# Altium PCB ESP Guage PCB_PCB.PcbDoc
Units mm, origin at the board's own origin, x right, y up, seen from the top; angles counter-clockwise.
Board outline 45 x 40 mm, 2 copper layers (Top Layer, Bottom Layer); 64 components, 47 nets, 224 pads, 44 vias.
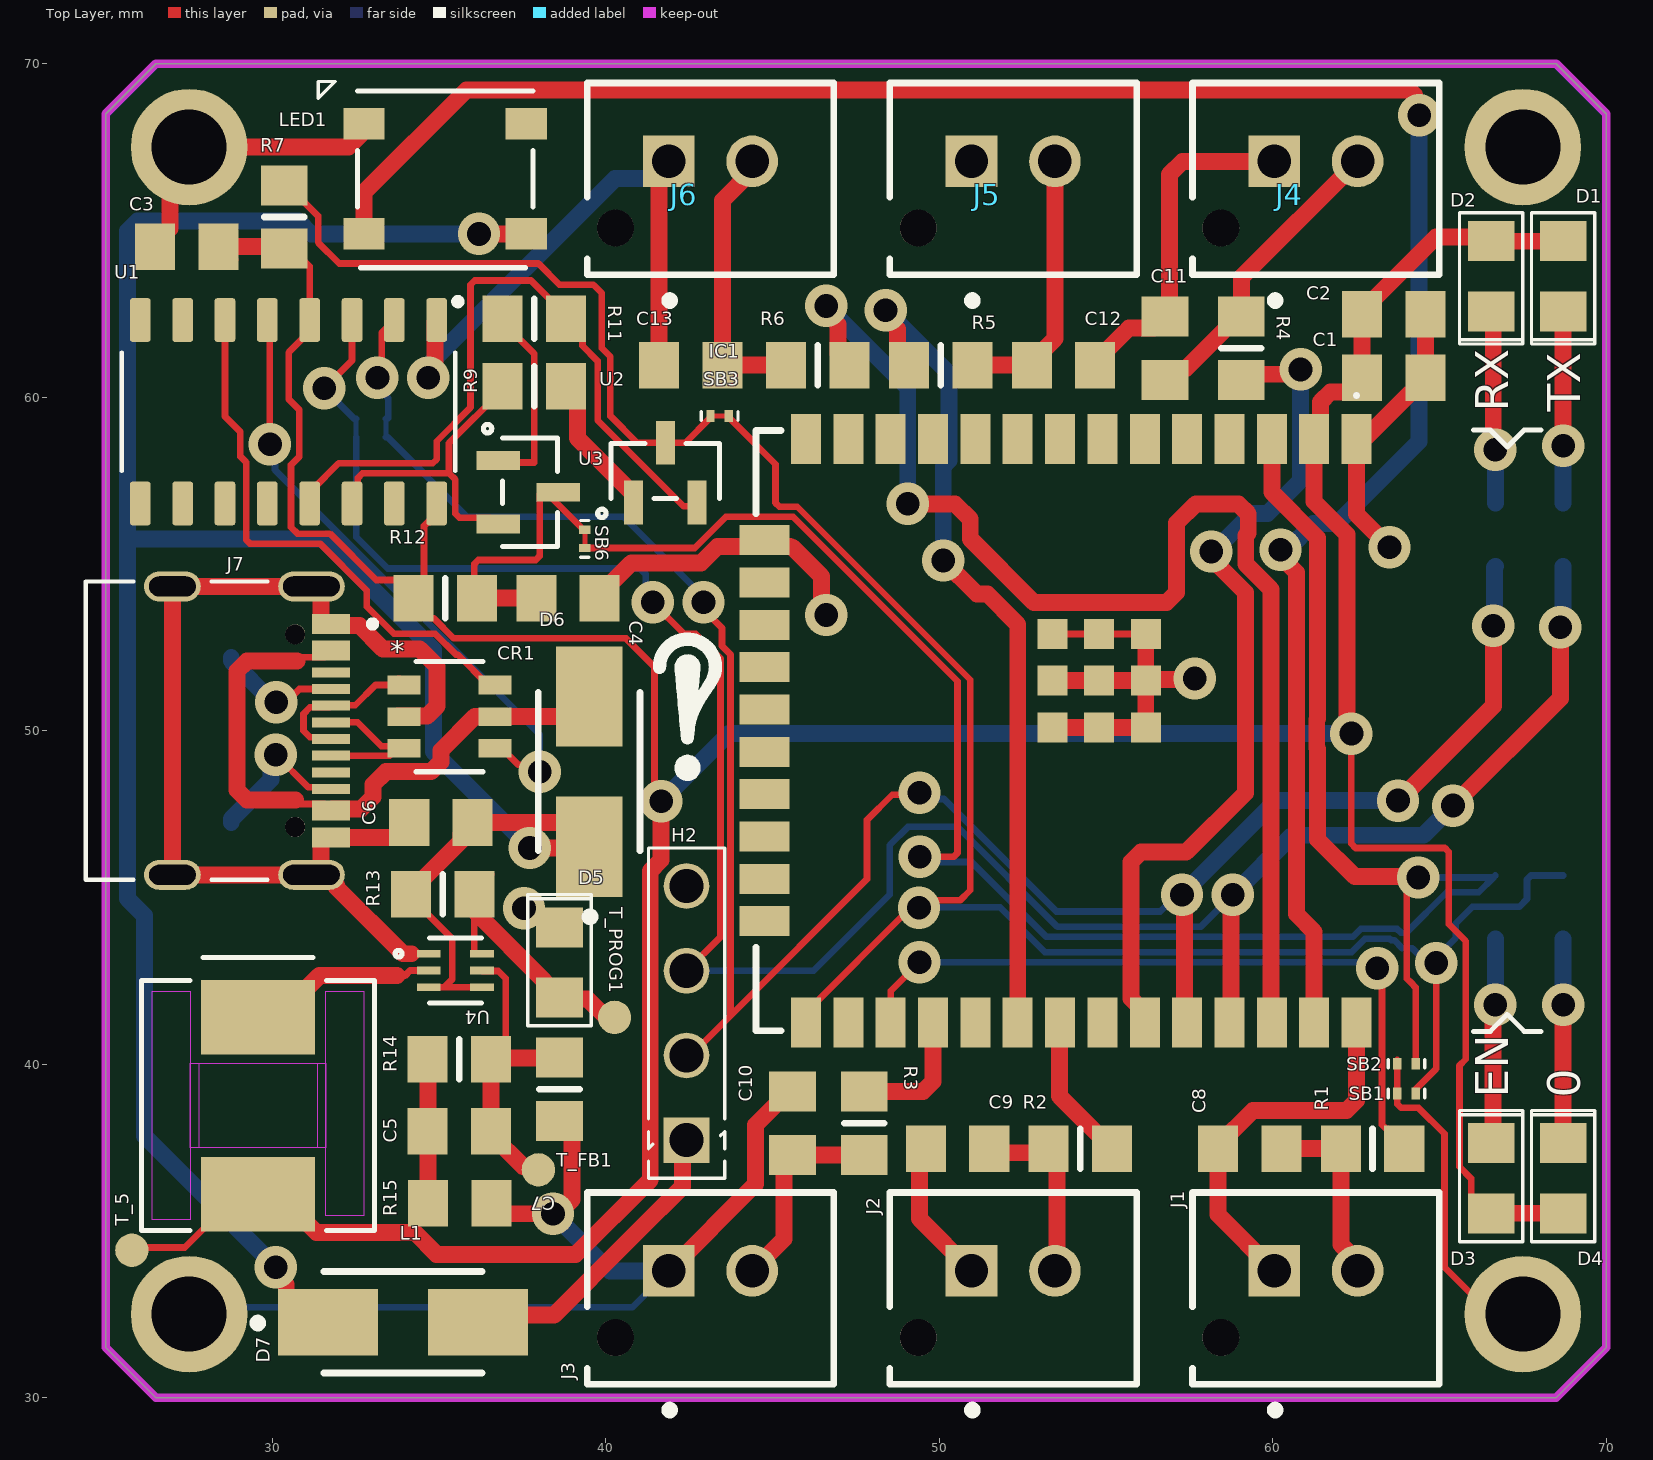
[diagram p0: Top Layer view]
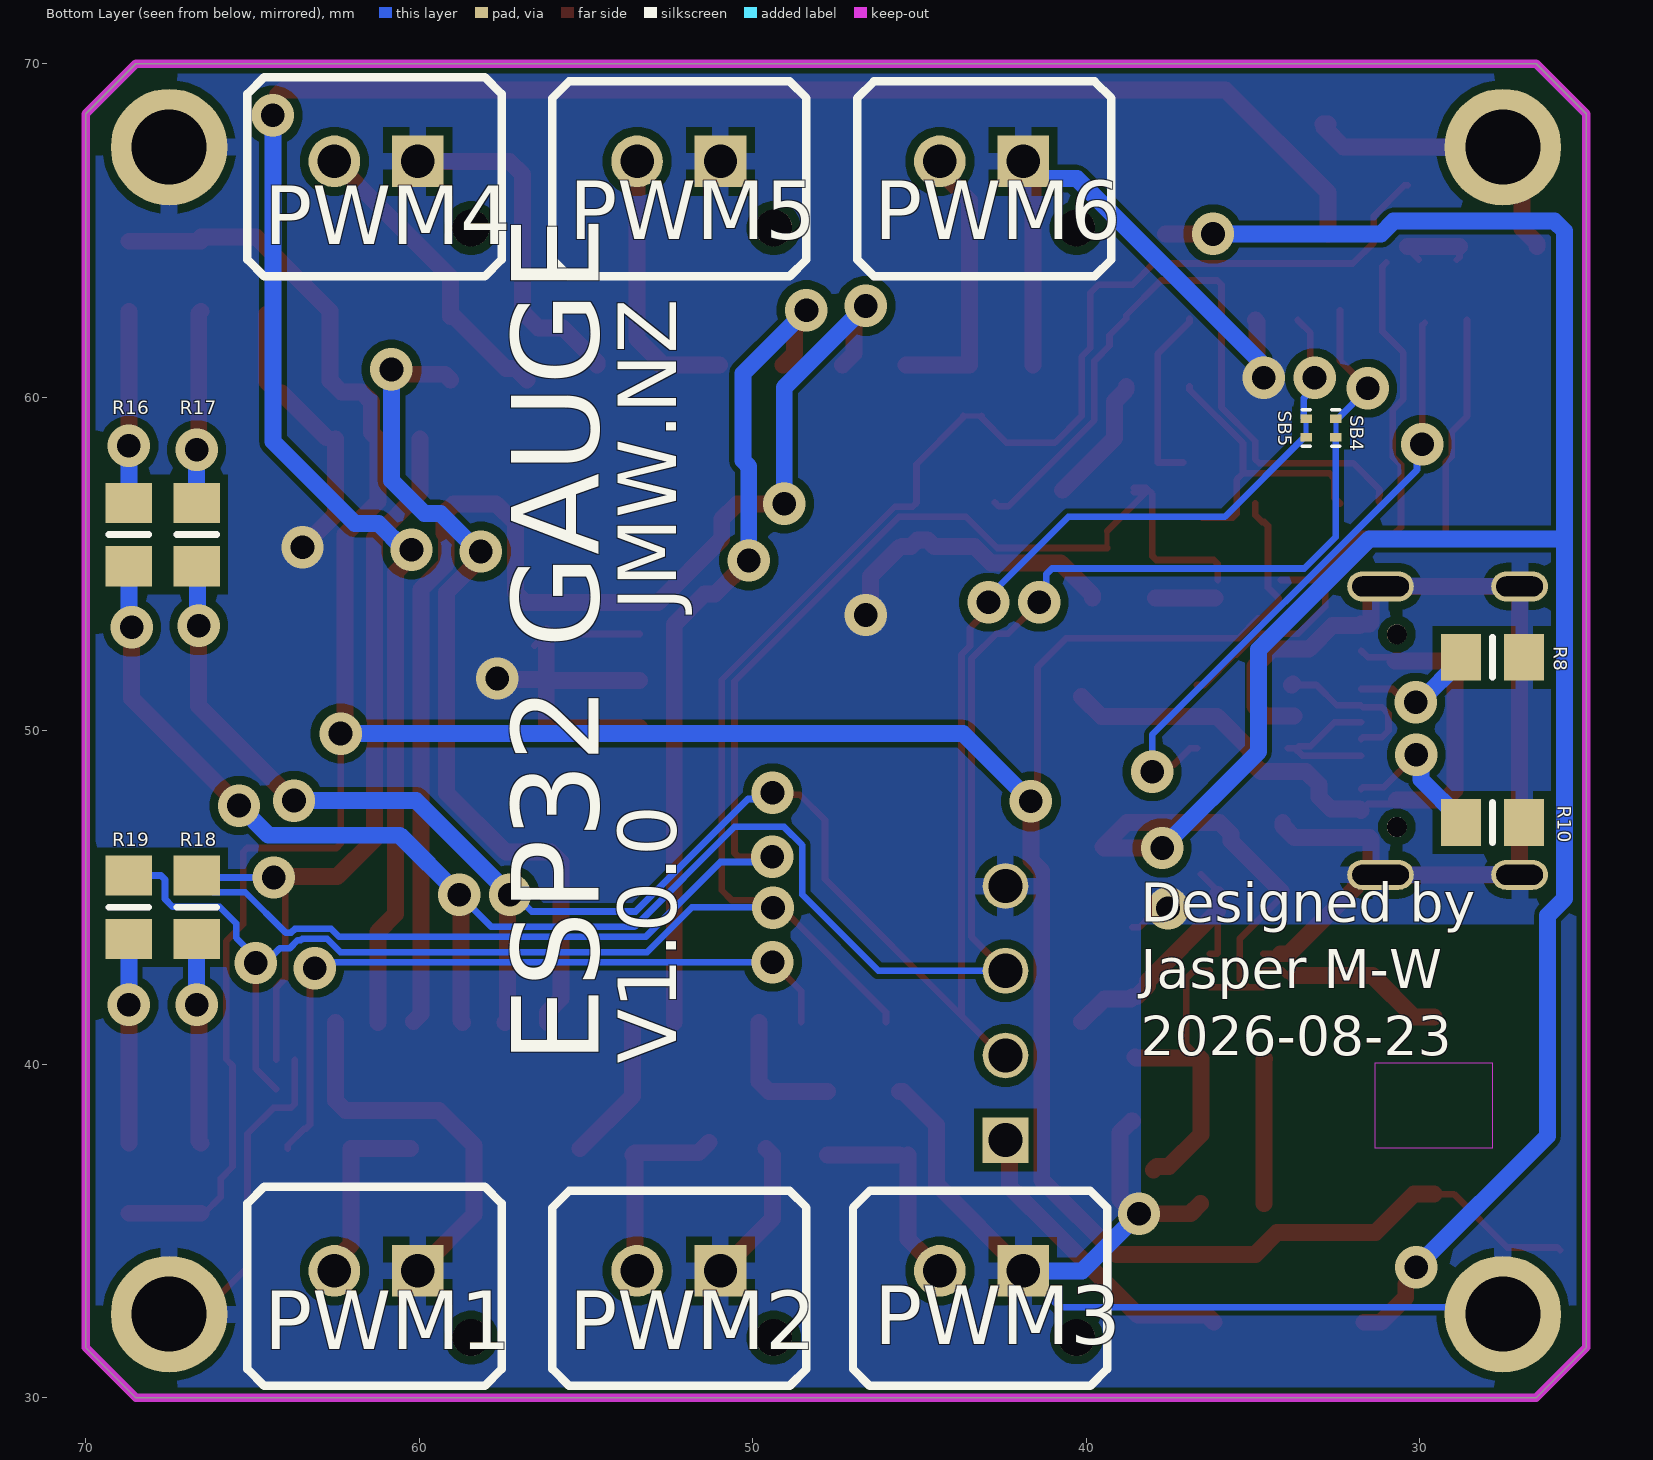
[diagram p1: Bottom Layer view, seen from below]
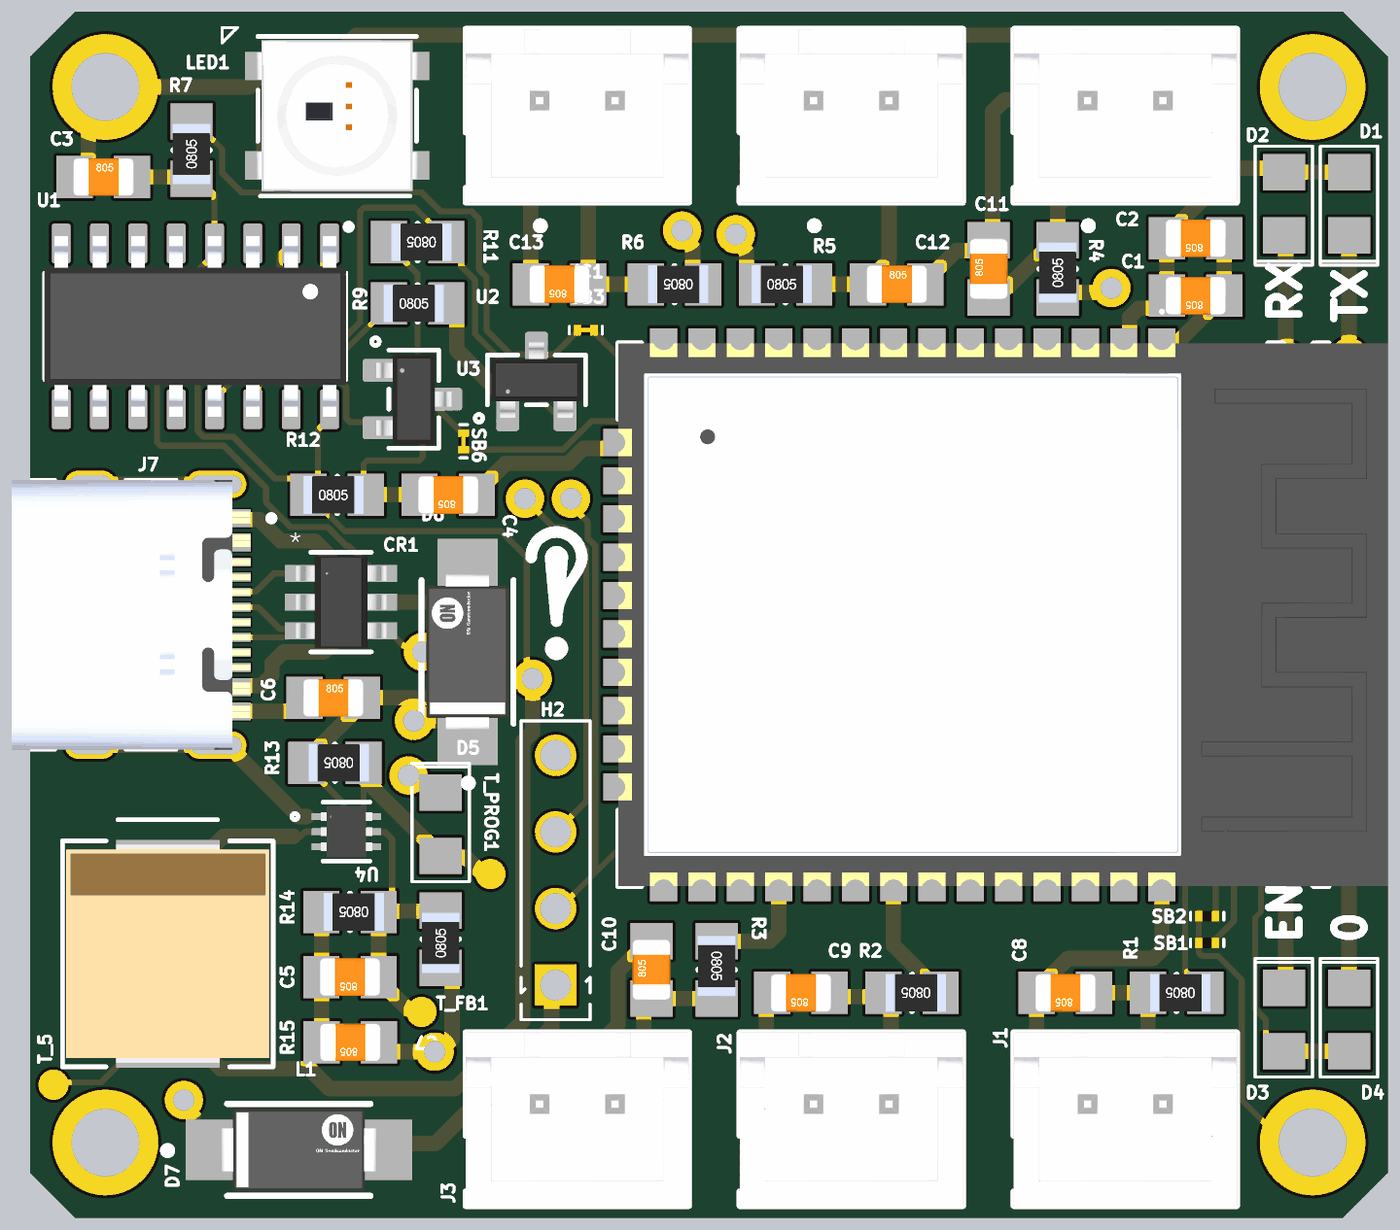
[diagram p2: 3D render of the assembled board from above, using the file's embedded part models]
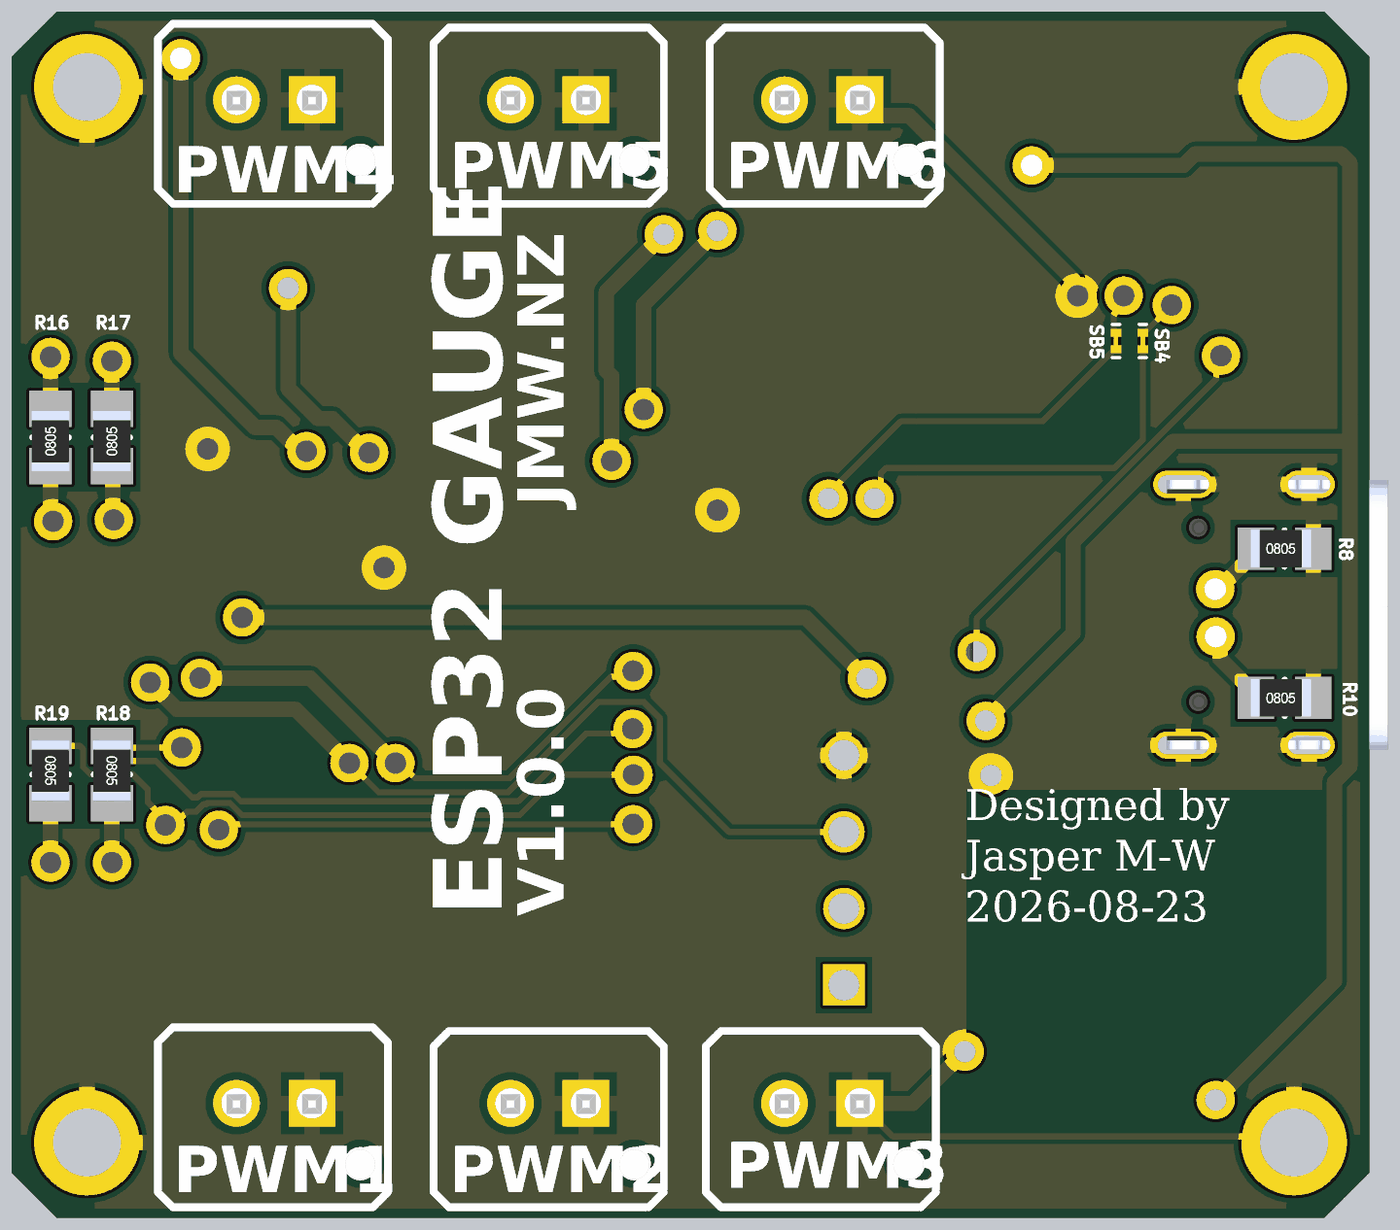
[diagram p3: 3D render of the assembled board from below, using the file's embedded part models]

## Layer stack, top to bottom
Top Solder: solder mask 0.0102, Solder Resist, Dk 3.5
Top Layer: signal copper 0.0356
Dielectric 1: dielectric 0.32, FR-4, Dk 4.8
Bottom Layer: signal copper 0.0356
Bottom Solder: solder mask 0.0102, Solder Resist, Dk 3.5

## Board outline
25,31.5 25,68.5 26.5,70 68.5,70 70,68.5 70,31.5 68.5,30 26.5,30

## Design rules (kind name [scope] priority, off if disabled: settings)
BoardOutlineClearance [All] p1: gap=0.3 ignorepadtopadclearanceinfootprint=FALSE except(0.4: Arc-SplitBarrior Arc-SplitContinuation Track-SplitBarrior Track-SplitContinuation SMDPad-SplitBarrior SMDPad-SplitContinuation THPad-SplitBarrior THPad-SplitContinuation Via-SplitBarrior Via-SplitContinuation Fill-SplitBarrior Fill-SplitContinuation Poly-SplitBarrior Poly-SplitContinuation Region-SplitBarrior Region-SplitContinuation Text-SplitBarrior Text-SplitContinuation)
Clearance [All] p1: gap=0.254 ignorepadtopadclearanceinfootprint=TRUE except(0.1: Arc-Arc Arc-Track Track-Track; 0.15: Arc-SMDPad Arc-THPad Arc-Via Arc-Fill Arc-Poly Arc-Region Arc-Text Track-SMDPad Track-THPad Track-Via Track-Fill Track-Poly Track-Region Track-Text SMDPad-SMDPad)
Height [All] p1: minheight=0 maxheight=50 prefheight=12.7
HoleSize [All] p1: absolutevalues=TRUE maxlimit=12 minlimit=0.25 maxpercent=80.000 minpercent=20.000
MinimumAnnularRing [All] p1: minimumring=0.13
MinimumSolderMaskSliver [All] p1: minsoldermaskwidth=0.102
PolygonConnect [All] p1: thpad.connectstyle=Relief thpad.reliefconductorwidth=0.508 thpad.reliefentries=4 thpad.polygonreliefangle="90 Angle" thpad.airgapwidth=0.254 smdpad.connectstyle=Relief smdpad.reliefconductorwidth=0.508 smdpad.reliefentries=4 smdpad.polygonreliefangle="90 Angle" smdpad.airgapwidth=0.254 via.connectstyle=Direct via.reliefconductorwidth=0.508 via.reliefentries=4 via.polygonreliefangle="90 Angle" via.airgapwidth=0.254
RoutingVias [All] p1: holewidth=0.4 width=0.65 viastyle="Through Hole" minholewidth=0.25 minwidth=0.4 maxholewidth=1 maxwidth=2
SilkToSilkClearance [All] p1: silktosilkclearance=0.102
SilkToSolderMaskClearance [IsPad] p1: minsilkscreentomaskgap=0.102 clearancetoexposedcopper=TRUE
SolderMaskExpansion [All] p1: expansion=0.102 istentingtop=FALSE
SupplyNets "Schematic Supply Nets_4" [InNet('3V3')] p1: voltage=0.000
SupplyNets "Schematic Supply Nets_3" [InNet('EXT_5V')] p2: voltage=0.000
SupplyNets "Schematic Supply Nets_2" [InNet('GND')] p3: voltage=0.000
SupplyNets "Schematic Supply Nets_1" [InNet('USB_VBUS')] p4: voltage=0.000
SupplyNets "Schematic Supply Nets" [InNet('5V')] p5: voltage=0.000
Width [All] p1: maxlimit=10.16 minlimit=0.2 preferedwidth=0.508 minimp=50.000000 maximp=50.000000 favimp=50.000000
25 further rules are at their usual default settings.

## Components (designator, comment, footprint, x,y, rotation, side; value= is the part's Value field where it differs from the comment)
C1 "22uF" C0805 63.627,60.579 r180 top
C2 "100nF" C0805 63.627,62.484 r180 top
C3 "100nF" C0805 27.432,64.516 r0 top
C4 "2.2uF" C0805 38.862,53.975 r180 top
C5 "22pF" C0805 35.604,37.99 r180 top
C6 "4.7uF" C0805 35.052,47.244 r0 top
C7 "22uF" C0805 35.614,35.823 r180 top
C8 "100nF" C0805 59.309,37.465 r180 top
C9 "100nF" C0805 50.546,37.465 r180 top
C10 "100nF" C0805 45.593,38.227 r90 top
C11 "100nF" C0805 56.769,61.468 r90 top
C12 "100nF" C0805 53.721,60.96 r0 top
C13 "100nF" C0805 42.545,60.96 r180 top
CR1 "USBLC6-2SC6" SOT23-6L_STM 35.308,50.419 r0 top
D1 "LED_0805" LED_0805-Footprint-1 68.707,63.627 r270 top
D2 "LED_0805" LED_0805-Footprint-1 66.548,63.627 r270 top
D3 "LED_0805" LED_0805-Footprint-1 66.548,36.576 r90 top
D4 "LED_0805" LED_0805-Footprint-1 68.707,36.576 r90 top
D5 "LED_0805" LED_0805-Footprint-1 38.608,43.053 r90 top
D6 "ES1H" DO-214AC 39.497,48.768 r90 top value=8pF
D7 "ES1H" DO-214AC 33.909,32.258 r0 top value=8pF
H2 "1x4 Header 2.54mm" HEADER_2.54MM_1x4PIN 42.418,41.529 r90 top locked
IC1 "ESP32-WROOM-32E-N4" ESP32WROOM32EN4 57.25,50 r270 top locked
J1 "B2B-XH-AM(LF)(SN)" FP-B2B-XH-AM_LF_SN-MFG 61.294,33.274 r180 top locked
J2 "B2B-XH-AM(LF)(SN)" FP-B2B-XH-AM_LF_SN-MFG 52.215,33.274 r180 top locked
J3 "B2B-XH-AM(LF)(SN)" FP-B2B-XH-AM_LF_SN-MFG 43.136,33.274 r180 top locked
J4 "B2B-XH-AM(LF)(SN)" FP-B2B-XH-AM_LF_SN-MFG 61.294,66.548 r180 top locked
J5 "B2B-XH-AM(LF)(SN)" FP-B2B-XH-AM_LF_SN-MFG 52.215,66.548 r180 top locked
J6 "B2B-XH-AM(LF)(SN)" FP-B2B-XH-AM_LF_SN-MFG 43.136,66.548 r180 top locked
J7 "TYPE-C-31-M-12" HRO_TYPE-C-31-M-12 27,50 r270 top locked
L1 "IHLP2525CZER1R0M01" IND_IHLP-2525CZ-01_VIS 29.567,38.755 r270 top
LED1 "COM-16347" COM-16347_SPK 35.179,66.548 r180 top locked
R1 "10kj" R0805 62.992,37.465 r180 top value=28k
R2 "10kj" R0805 54.229,37.465 r180 top value=28k
R3 "10kj" R0805 47.752,38.227 r270 top value=28k
R4 "10kj" R0805 59.055,61.468 r90 top value=28k
R5 "10kj" R0805 50.038,60.96 r0 top value=28k
R6 "10kj" R0805 46.355,60.96 r180 top value=28k
R7 "10kj" R0805 30.353,65.405 r90 top value=10k
R8 "10kj" R0805 27.813,52.197 r180 bottom value=5.1k
R9 "10kj" R0805 37.846,60.325 r0 top value=10k
R10 "10kj" R0805 27.813,47.244 r180 bottom value=5.1k
R11 "10kj" R0805 37.846,62.357 r180 top value=10k
R12 "10kj" R0805 35.179,53.975 r0 top value=10k
R13 "10kj" R0805 35.106,45.094 r180 top value=1k
R14 "10kj" R0805 35.604,40.149 r180 top value=68k
R15 "10kj" R0805 38.608,39.243 r90 top value=15k
R16 "10kj" R0805 68.707,55.88 r90 bottom value=4.7k
R17 "10kj" R0805 66.675,55.88 r90 bottom value=4.7k
R18 "10kj" R0805 66.675,44.704 r270 bottom value=4.7k
R19 "10kj" R0805 68.707,44.704 r270 bottom value=4.7k
SB1 "Solder Jumper Normally Open 0201" "Solder Bridge Open 0201" 64.008,39.116 r0 top
SB2 "Solder Jumper Normally Open 0201" "Solder Bridge Open 0201" 64.008,40.005 r0 top
SB3 "Solder Jumper Normally Closed 0201" "Solder Bridge Closed 0201" 43.413,59.436 r180 top net-tie
SB4 "Solder Jumper Normally Closed 0201" "Solder Bridge Closed 0201" 32.512,59.076 r270 bottom net-tie
SB5 "Solder Jumper Normally Closed 0201" "Solder Bridge Closed 0201" 33.401,59.076 r270 bottom net-tie
SB6 "Solder Jumper Normally Closed 0201" "Solder Bridge Closed 0201" 39.37,55.753 r90 top net-tie
T_5 "Surface Test Pad" "Test Pad" 25.781,34.417 r90 top
T_FB1 "Surface Test Pad" "Test Pad" 37.973,36.83 r90 top
T_PROG1 "Surface Test Pad" "Test Pad" 40.259,41.402 r90 top
U1 "CH340C" SOIC127P600X180-16N 30.48,59.563 r270 top
U2 "BC817-40,215" SOT23_NEX 41.783,57.785 r0 top
U3 "BC817-40,215" SOT23_NEX 37.719,57.15 r270 top
U4 "TPS62A01DRLR" SOT6_DRL_TEX 35.487,42.808 r0 top

## Footprints (in the part's own frame and the unit in brackets; to place one, negate y for a bottom-side part, rotate by r counter-clockwise, add the part's x,y. Pads: shape width x height; smd on the part's side, far side on the other; paste and mask are expansions set on the pad)
C0805 [mm]
  rect 1.2x1.4 smd: 1(-0.95,0) 2(0.95,0)
  body extent -1,-0.63 1,0.63, height 0.78
COM-16347_SPK [mm]
  rect 1.239x0.939 smd paste+0 mask+0: 1(-2.436,1.65) 2(-2.436,-1.65) 3(2.436,-1.65) 4(2.436,1.65)
  silkscreen extent -2.63,-2.92 3.81,2.67, body extent -2.7,-2.5 2.7,2.5, height 1.56
DO-214AC [mm]
  rect 3x2 smd paste+0 mask+0: 1(-2.25,0) 2(2.25,0)
  silkscreen extent -4.47,-1.52 2.37,1.52, body extent -3.57,-1.58 3.57,1.58, height 0.25
ESP32WROOM32EN4 [mm]
  rect 1.5x0.9 smd: 1(-8.75,5.26) 2(-8.75,3.99) 3(-8.75,2.72) 4(-8.75,1.45) 5(-8.75,0.18) 6(-8.75,-1.09) 7(-8.75,-2.36) 8(-8.75,-3.63) 9(-8.75,-4.9) 10(-8.75,-6.17) 11(-8.75,-7.44) 12(-8.75,-8.71) 13(-8.75,-9.98) 14(-8.75,-11.25) 25(8.75,-11.25) 26(8.75,-9.98) 27(8.75,-8.71) 28(8.75,-7.44) 29(8.75,-6.17) 30(8.75,-4.9) 31(8.75,-3.63) 32(8.75,-2.36) 33(8.75,-1.09) 34(8.75,0.18) 35(8.75,1.45) 36(8.75,2.72) 37(8.75,3.99) 38(8.75,5.26)
  rect 0.9x1.5 smd: 15(-5.715,-12.5) 16(-4.445,-12.5) 17(-3.175,-12.5) 18(-1.905,-12.5) 19(-0.635,-12.5) 20(0.635,-12.5) 21(1.905,-12.5) 22(3.175,-12.5) 23(4.445,-12.5) 24(5.715,-12.5)
  rect 0.9x0.9 smd: 39(-2.9,-1.06) 40(-2.9,-2.46) 41(-2.9,-3.86) 42(-1.5,-3.86) 43(-0.1,-3.86) 44(-0.1,-2.46) 45(-0.1,-1.06) 46(-1.5,-1.06) 47(-1.5,-2.46)
  silkscreen extent -10.1,-12.75 9.02,10.8, body extent -9,-12.75 9,12.75, height 3.25
FP-B2B-XH-AM_LF_SN-MFG [mm]
  rect 1.55x1.55 hole 1 paste-2539.97 mask+0: 1(1.25,-0.525)
  round 1.55 hole 1 paste-2539.97 mask+0: 2(-1.25,-0.525)
  round 1.1 hole 1.1 unplated paste-2539.97 mask+0: ""(2.85,1.475)
  silkscreen extent -3.7,-2.88 3.7,3.77, body extent -3.8,-2.98 3.8,2.98, height 0.25
HEADER_2.54MM_1x4PIN [mm]
  rect 1.37x1.37 hole 1.02: 1(-3.81,0)
  round 1.37 hole 1.02: 2(-1.27,0) 3(1.27,0) 4(3.81,0)
  silkscreen extent -4.95,-1.14 4.95,1.14
HRO_TYPE-C-31-M-12 [mm]
  rect 0.6x1.14 smd mask+0.05: A1_B12(-3.2,4.75) A4_B9(-2.4,4.75) B1_A12(3.2,4.75) B4_A9(2.4,4.75)
  rect 0.3x1.14 smd mask+0.05: A5(-1.25,4.75) A6(-0.25,4.75) A7(0.25,4.75) A8(1.25,4.75) B5(1.75,4.75) B6(0.75,4.75) B7(-0.75,4.75) B8(-1.75,4.75)
  oval 0.9x2 hole 0.6 slot 1.7 at 90 deg: S1(-4.325,4.17) S2(4.325,4.17)
  oval 0.9x1.7 hole 0.6 slot 1.4 at 90 deg: S3(-4.325,0) S4(4.325,0)
  round 0.6 hole 0.6 unplated: ""(-2.89,3.68) ""(2.89,3.68)
  silkscreen extent -4.47,-2.6 4.47,6.1, body extent -4.47,-2.6 4.47,5.31, height 3.31
IND_IHLP-2525CZ-01_VIS [mil]
  rect 88x135 smd paste+0 mask+0: 1(-104.5,0) 2(104.5,0)
  Top Layer keep-out region: -50,-80 -50,80 50,80 50,-80
  Top Layer keep-out region: -135,80 -135,125 130,125 130,80
  Top Layer keep-out region: -135,-125 -135,-80 135,-80 135,-125
  Keep-Out Layer region: -50,-69.5 -50,70 50,70 50,-69.5
  silkscreen extent -175,-138 148,138, body extent -143,-133 143,133, height 120
LED_0805-Footprint-1 [mm]
  rect 1.2x1.4 smd: 1(1.05,0) 2(-1.05,0)
  silkscreen extent -1.91,-0.95 2.03,0.95, body extent -1,-0.63 1,0.63, height 1.1
R0805 [mm]
  rect 1.2x1.4 smd: 1(-0.95,0) 2(0.95,0)
  silkscreen extent 0,-0.6 0,0.6, body extent -1.13,-0.63 0.87,0.63, height 0.45
SOIC127P600X180-16N [mm]
  rrect25% 1.31x0.62 smd: 1(-2.75,4.445) 2(-2.75,3.175) 3(-2.75,1.905) 4(-2.75,0.635) 5(-2.75,-0.635) 6(-2.75,-1.905) 7(-2.75,-3.175) 8(-2.75,-4.445) 9(2.75,-4.445) 10(2.75,-3.175) 11(2.75,-1.905) 12(2.75,-0.635) 13(2.75,0.635) 14(2.75,1.905) 15(2.75,3.175) 16(2.75,4.445)
  silkscreen extent -3.4,-5 1.78,5.18, body extent -3,-5 3,5, height 1.8
"Solder Bridge Closed 0201" [mm]
  rect 0.25x0.35 smd paste-100 mask+0: 1(-0.275,0) 2(0.275,0)
  Top Layer lines w0.15: 0.225,0 -0.225,0
  silkscreen extent -0.55,-0.13 0.55,0.13
"Solder Bridge Open 0201" [mm]
  rect 0.25x0.35 smd paste-100 mask+0: 1(-0.275,0) 2(0.275,0)
  silkscreen extent -0.55,-0.13 0.55,0.13
SOT6_DRL_TEX [mil]
  rect 28x9 smd paste+0 mask+0: 1(-31.5,19.69) 2(-31.5,0) 3(-31.5,-19.69) 4(31.5,-19.69) 5(31.5,0) 6(31.5,19.69)
  silkscreen extent -71,-38 30,38, body extent -34,-34 34,34, height 24
SOT23-6L_STM [mil]
  rect 38.5x22 smd paste+0 mask+0: 1(-53.75,37.4) 2(-53.75,0) 3(-53.75,-37.4) 4(53.75,-37.4) 5(53.75,0) 6(53.75,37.4)
  silkscreen extent -40,-65 40,65, body extent -59,-60 59,60, height 57
SOT23_NEX [mil]
  rect 22.36x51.56 smd paste+3.86 mask+4: 1(-37.5,-37.21) 2(37.5,-37.21) 3(0,33.36)
  silkscreen extent -80,-55 64,32, body extent -59,-49 59,49, height 43
"Test Pad" [mm] "Exposed copper pad"
  round 1 smd paste-10: 1(0,0)

## Part data
C1 C2 C3 C4 C5 C6 C7 C8 C9 C10 C11 C12 C13: library part CMP-00003-4, "Generic 0805 cramic capacitor"
CR1: "ESD Protection for USB 2.0 High Speed", Manufacturer_Name=STMicroelectronics, Copyright="Copyright (C) 2025 Ultra Librarian. All rights reserved.", Manufacturer_Part_Number=USBLC6-2SC6, RefDes=RefDes, Type=Type
D1 D2 D3 D4 D5: library part CMP-004-00004-1, "Generic SMT LED 0805"
D6 D7: library part CMP-004-00002-1, "Rectifier Diode, 1 Phase, 1 Element, 1A, 500V V(RRM), Silicon, DO-214AC", Forward Current=1A, Forward Voltage=1.7V, Reverse Recovery Time=35ns
IC1: "RX TXRX MOD WIFI TRACE ANT SMD", Manufacturer_Name="Espressif Systems", Mouser Part Number=356-ESP32WRM32E132PH, Datasheet Link=https://www.espressif.com/sites/default/files/documentation/esp32-wroom-32e_esp32-wroom-32ue_datasheet_en.pdf, Geometry.Height=3.25mm, Manufacturer_Part_Number=ESP32-WROOM-32E-N4, Mouser Price/Stock=https://www.mouser.co.uk/ProductDetail/Espressif-Systems/ESP32-WROOM-32E-N4?qs=Li%252BoUPsLEnsPzTWsi%252BRMgQ%3D%3D
J1 J2 J3 J4 J5 J6: library part CMP-17439-000037-1, "CONN HEADER VERT 2POS 2.5MM", Color=Green, Contact Resistance=20mR, Housing Color=White, Max Current Rating=3A, Max Operating Temperature=85°C, Max Voltage Rating (AC)=250V, Min Operating Temperature=-25°C, Connector Type="Male Pin", Contact Material=Brass, Contact Plating=Tin, Contact Type="Male Pin", Depth=5.75mm, Fastening Type=Detent, Housing Material=Polyamide, Lead Free="Lead Free", Length=7.4mm, Mount="Through Hole", Number of Positions=2, Number of Rows=1, Orientation=Straight, Packaging=Bulk, Pitch=2.5mm, Series=XH, Termination=Solder
J7: "USB Connectors 24 Receptacle 1 8.94*7.3mm RoHS", Package=Package, Check_prices=https://www.snapeda.com/parts/TYPE-C-31-M-12/HRO+Electronics+Co.%252C+Ltd./view-part/?ref=eda, MF="HRO Electronics Co., Ltd.", MP=TYPE-C-31-M-12, SnapEDA_Link=https://www.snapeda.com/parts/TYPE-C-31-M-12/HRO+Electronics+Co.%252C+Ltd./view-part/?ref=snap
L1: "IHLP-2525CZ-01 1 20% ER E3 1uH", Manufacturer_Name=Vishay, Copyright="Copyright (C) 2025 Ultra Librarian. All rights reserved.", Manufacturer_Part_Number=IHLP2525CZER1R0M01
LED1: "Description", Manufacturer_Name=Sparkfun, Copyright="Copyright (C) 2026 Ultra Librarian. All rights reserved.", Manufacturer_Part_Number=COM-16347, RefDes=RefDes, Type="LED Addressable"
R1 R2 R3 R4 R5 R6 R7 R8 R9 R10 R11 R12 R13 R14 R15 R16 R17 R18 R19: library part CMP-00002-12, "Generic 0805 resistor", Package=0805, Voltage Rating=150V
U1: "USB to serial chip CH340", Package=None, Availability="Not in stock", Check_prices=https://www.snapeda.com/parts/CH340C/WCH/view-part/?ref=eda, MF=WCH, MP=CH340C, Price=None, SnapEDA_Link=https://www.snapeda.com/parts/CH340C/WCH/view-part/?ref=snap
U2 U3: "Description", Manufacturer_Name=Nexperia, Copyright="Copyright (C) 2026 Ultra Librarian. All rights reserved.", Manufacturer_Part_Number=BC817-40,215
U4: "2.5V-to-5.5V input, 1A output high-efficiency step-down converter 6-SOT-5X3 -40 to 125", Manufacturer_Name="Texas Instruments", Copyright="Copyright (C) 2025 Ultra Librarian. All rights reserved.", Manufacturer_Part_Number=TPS62A01DRLR, RefDes=RefDes, Type=Type
SB1 SB2 SB3 SB4 SB5 SB6: DEBUG=DEBUG

## Free pads (board coordinates)
  round 3.5 hole 2.25: 4(27.5,32.5) 4(27.5,67.5) 4(67.5,32.5) 4(67.5,67.5)

## Via types
v1: diameter 1.27, hole 0.711, Top Layer to Bottom Layer, 44 vias

## Nets (pads, with @x,y where several pads share a name; then routed paths per layer and width w, separated by ;. In a path a pad name is that pad's centre, name@x,y a point inside that pad or via, vN(x,y) a via of type N, cw(c..) or ccw(c..) an arc to the next point about the centre after c; other vN are vias at no path point)
3V3: C1.2 C2.2 C3.2 C5.2 C7.2 D1.2 D2.2 D3.2 D4.2 IC1.2 L1.2 R7.1 R12.1 R14.2 T_5.1 U1.4 U1.16 | length 127
  Top Layer w0.2: T_5.1 25.864,34.5 27.369,34.5 28.97,36.101 L1.2 ; C3.2@28.799,64.516 28.799,64.204 C3.2@28.882,64.121 ; R7.1@30.019,64.121 R7.1 ; R7.1@30.998,64.038 31.115,63.921 U1.4 31.115,61.968 30.484,61.337 30.484,59.942 30.808,59.618 30.808,58.223 30.555,57.97 30.555,56.1 30.747,55.908 31.722,55.908 33.113,54.517 R12.1@34.156,54.517 ; U1.16 34.925,56.468 34.715,56.258 34.661,56.258 34.544,56.141 34.544,54.29 R12.1 34.229,53.875 34.729,53.375 34.829,53.375 35.436,52.768 40.601,52.768 41.279,52.09 41.279,52.084 41.458,51.906 41.458,48.077 v1(41.656,47.879) ; v1(62.357,49.911) 62.357,46.609 62.484,46.482 65.161,46.482 65.278,46.365 65.278,44.196 65.786,43.688 65.786,40.145 65.598,39.957 65.598,36.922 65.948,36.572 65.948,36.026 66.448,35.526 D3.2
  Top Layer w0.508: C3.2@28.799,64.516 R7.1@30.358,64.516 ; L1.2 30.164,36.101 31.319,34.945 34.27,34.945 34.925,34.29 39.092,34.29 41.329,36.527 41.329,45.79 41.656,46.117 v1(41.656,47.879) ; R14.2 34.659,40.144 34.659,35.828 C7.2 ; v1(62.357,49.911) 62.23,50.038 62.23,55.88 61.24,56.87 IC1.2 61.436,58.946 61.436,59.863 61.734,60.161 62.331,60.161 C1.2@62.677,60.507 ; C1.2@62.677,60.479 C1.2@62.677,60.507 ; D3.2 D4.2 ; D2.2 D1.2 ; D2.2@66.548,64.804 64.897,64.804 62.677,62.584 C2.2 C1.2 C1.2@62.677,60.507
  Bottom Layer w0.508: v1(41.656,47.879) 43.688,49.911 v1(62.357,49.911)
5V: C6.2 D6.1 D7.1 LED1.1 R13.2 U4.3 U4.4 | length 78.8
  Top Layer w0.2: R13.2@34.156,44.994 35.396,43.754 35.396,42.547 35.171,42.322 ; U4.3 U4.4
  Top Layer w0.508: v1(30.099,33.909) 30.099,33.703 30.413,33.389 30.413,33.004 31.159,32.258 D7.1 ; R13.2@34.156,45.194 35.656,46.694 35.656,46.898 C6.2 38.771,47.244 D6.1 39.461,46.482 v1(37.719,46.482) ; v1(36.195,64.897) LED1.1
  Bottom Layer w0.508: v1(30.099,33.909) 26.162,37.846 26.162,44.45 25.654,44.958 25.654,55.626 ; v1(36.195,64.897) 31.161,64.897 30.78,65.278 25.952,65.278 25.654,64.98 25.654,55.626 ; v1(37.719,46.482) 34.823,49.378 34.823,52.429 31.5,55.753 25.781,55.753 25.654,55.626
ESP_BOOT: IC1.25 R19.1 SB1.2 SB3.1 | length 50.4
  Top Layer w0.2: SB3.1 43.688,59.386 45.085,57.989 45.085,56.832 45.202,56.715 45.736,56.715 50.927,51.524 50.927,45.212 50.623,44.908 49.594,44.908 v1@49.389,44.704 ; IC1.25 46,41.55 49.142,44.692 v1(49.389,44.692) ; SB1.2@64.283,39.243 64.897,39.857 64.897,43.026 v1(64.901,43.03)
  Bottom Layer w0.2: v1(49.389,44.692) 49.401,44.704 51.816,44.704 53.167,43.353 62.36,43.353 62.764,43.757 63.498,43.757 63.5,43.755 63.51,43.755 63.549,43.716 63.643,43.716 63.889,43.469 64.185,43.469 64.624,43.03 64.897,43.03 v1(64.901,43.03) ; v1@64.897,43.053 64.897,43.196 65.487,43.786 65.487,44.219 65.982,44.714 67.389,44.714 67.625,44.95 67.625,45.537 67.742,45.654 R19.1
ESP_EN: IC1.3 R18.1 SB2.2 SB6.1 | length 63.1
  Top Layer w0.2: SB6.1 42.666,55.478 43.603,56.415 45.612,56.415 50.546,51.481 50.546,46.333 50.429,46.216 v1(49.415,46.216) ; SB2.2@64.283,40.132 64.283,42.3 64.14,42.443 64.016,42.567 64.016,43.239 64.012,43.243 64.012,45.18 64.362,45.53 v1(64.362,45.597)
  Top Layer w0.508: IC1.3 59.97,57.153 61.341,55.782 61.341,50.364 61.318,50.341 61.318,49.481 61.341,49.458 61.341,46.736 62.457,45.62 64.338,45.62 v1(64.362,45.597)
  Bottom Layer w0.2: v1(49.415,46.216) 49.571,46.06 50.968,46.06 53.213,43.815 62.398,43.815 62.64,44.057 63.622,44.057 63.624,44.055 63.728,44.055 63.84,43.942 64.006,43.942 65.218,45.154 66.175,45.154 R18.1@66.618,45.597 ; v1(64.362,45.597) R18.1@66.618,45.597 ; R18.1 66.641,45.62 R18.1@66.618,45.597
ESP_RX: H2.2 IC1.34 R17.1 SB5.2 | length 64.9
  Top Layer w0.2: H2.2@42.545,40.259 43.734,41.448 ; v1(42.926,53.848) 42.926,53.634 43.48,53.08 43.48,52.54 43.734,52.286 43.734,41.448 ; v1(49.403,48.133) 49.347,48.077 48.585,48.077 47.831,47.323 47.831,45.545 43.734,41.448
  Top Layer w0.508: v1(57.277,45.081) 57.358,45 57.358,41.322 IC1.34 ; v1(63.754,47.902) 63.777,47.902 66.613,50.738 v1(66.613,53.145)
  Bottom Layer w0.2: SB5.2 33.451,58.801 35.838,56.414 40.526,56.414 42.926,54.014 v1(42.926,53.848) ; v1(49.403,48.133) 49.589,47.947 50.14,47.947 53.51,44.577 56.625,44.577 57.129,45.081 v1(57.277,45.081)
  Bottom Layer w0.508: v1(57.277,45.081) 60.098,47.902 v1(63.754,47.902) ; v1(66.613,53.145) 66.644,53.177 66.644,54.899 R17.1
ESP_TX: H2.3 IC1.35 R16.1 SB4.2 | length 66.3
  Top Layer w0.2: v1(41.402,53.848) 42.348,52.902 42.693,52.902 43.434,52.161 43.434,43.815 H2.3
  Top Layer w0.508: IC1.35 58.75,41.3 58.75,45.03 v1(58.801,45.081) ; v1(65.405,47.752) 68.622,50.969 v1(68.622,53.1)
  Bottom Layer w0.2: SB4.2 32.512,55.807 33.455,54.864 41.021,54.864 41.17,54.715 41.197,54.688 41.197,54.053 v1(41.402,53.848) ; H2.3@42.545,42.799 46.228,42.799 48.514,45.085 48.514,46.566 49.061,47.113 50.55,47.113 53.548,44.115 57.835,44.115 v1(58.801,45.081)
  Bottom Layer w0.508: v1(58.801,45.081) 60.583,46.863 64.516,46.863 v1(65.405,47.752) ; v1(68.622,53.1) 68.707,53.185 R16.1
EXT_5V: D7.2 H2.1 | length 9.3
  Top Layer w0.508: D7.2 36.369,32.468 38.437,32.468 40.707,34.738 40.707,34.741 40.944,34.978 40.947,34.978 42.291,36.322 42.291,37.465 H2.1@42.545,37.719
GND: C1.1 C2.1 C3.1 C4.1 C6.1 C7.1 C8.2 C9.2 C10.2 C11.2 C12.2 C13.2 CR1.2 D5.1 H2.4 IC1.1 IC1.15 IC1.38 IC1.39 IC1.40 IC1.41 IC1.42 IC1.43 IC1.44 IC1.45 IC1.46 IC1.47 J1.1 J2.1 J3.1 J4.1 J5.1 J6.1 J7.A1_B12 J7.B1_A12 J7.S1 J7.S2 J7.S3 J7.S4 LED1.3 pad.4 R8.2 R10.2 R15.1 SB1.1 SB2.1 U1.1 U4.1 | length 159.4
  Top Layer w0.127: U4.1@34.445,43.308 U4.1
  Top Layer w0.2: 34.175,43.308 U4.1 ; v1(37.545,44.67) 37.749,44.466 38.039,44.466 38.401,44.103 D5.1 ; IC1.41 IC1.40 IC1.39 56.32,52.9 56.32,52.77 IC1.39@56.54,52.55 ; SB2.1@63.733,40.132 SB2.1 63.733,38.804 63.85,38.687 64.373,38.687 65.151,37.91 65.151,33.909 pad.4@66.548,32.512
  Top Layer w0.508: C3.1 26.482,64.616 26.928,65.062 26.928,66.928 27.5,67.5 32.276,67.5 LED1.3@32.859,68.082 ; J7.S2@31.46,45.856 31.46,46.754 31.506,46.8 J7.B1_A12 33.756,46.8 34.102,47.146 C6.1 ; LED1.3 LED1.3@32.893,68.198 ; CR1.2@33.758,50.445 34.642,50.445 34.94,50.742 34.94,51.928 34.417,52.451 33.308,52.451 32.605,53.154 31.796,53.154 J7.A1_B12 31.506,53.2 31.46,53.246 31.46,54.144 31.279,54.325 J7.S1 J7.S3 J7.S4 J7.S2 31.614,45.675 31.916,45.373 31.916,45.301 33.909,43.308 34.175,43.308 ; v1(34.671,60.579) 34.671,60.785 34.869,60.983 34.869,62.257 U1.1 ; C7.1 36.874,35.512 v1(38.412,35.512) ; v1@38.354,35.306 38.989,35.941 38.989,37.947 38.643,38.293 R15.1 ; C4.1 39.812,54.075 40.761,55.024 42.854,55.024 43.349,55.519 44.554,55.519 IC1.15 45.05,55.715 45.246,55.519 45.524,55.519 45.544,55.499 45.593,55.499 46.463,54.629 46.463,53.613 v1(46.609,53.467) ; C13.2 41.595,66.782 J6.1 ; J3.1 44.489,36.402 44.489,38.173 45.493,39.177 C10.2 ; C9.2 49.403,37.272 49.403,35.361 J2.1 ; IC1.43 IC1.44 IC1.45 IC1.46 ; IC1.42 IC1.47 IC1.46 ; C12.2 54.671,61.06 55.683,62.072 56.423,62.072 C11.2 56.896,62.545 56.896,66.675 57.294,67.073 J4.1 ; IC1.39 IC1.46 ; v1(57.658,51.562) 57.627,51.531 56.221,51.531 IC1.46 ; J1.1 58.359,35.484 C8.2 58.359,37.565 59.402,38.608 62.212,38.608 62.51,38.906 IC1.38 ; IC1.1 62.51,56.489 v1(63.5,55.499) ; IC1.1@62.782,58.784 64.131,60.133 64.231,60.133 64.577,60.479 C1.1 C2.1
  Bottom Layer w0.2: pad.4@27.5,32.5 27.703,32.703 40.79,32.703 J3.1
  Bottom Layer w0.508: v1(34.671,60.579) 34.817,60.725 34.817,61.1 40.269,66.552 41.365,66.552 J6.1 ; v1(38.412,35.512) 40.126,33.799 J3.1
GPIO32: IC1.8
GPIO33: IC1.9
GPIO34: IC1.6
GPIO35: IC1.7
NetC4_2: C4.2 R12.2 SB6.2 U3.3 | length 8.8
  Top Layer w0.2: R12.2@36.056,54.517 36.056,55.001 36.173,55.118 37.894,55.118 38.011,55.235 38.011,57.093 38.195,57.277 U3.3@38.566,57.277 ; U3.3 38.198,57.15 SB6.2@39.37,55.978
  Top Layer w0.508: R12.2 C4.2
NetC5_1: C5.1 R14.1 R15.2 T_FB1.1 U4.5 | length 9.5
  Top Layer w0.2: U4.5 36.301,42.794 36.771,42.794 36.996,42.569 36.996,40.591 R14.1@36.583,40.178
  Top Layer w0.508: R14.1 C5.1 36.554,37.89 37.519,36.924 37.879,36.924 T_FB1.1 ; R14.1@36.583,40.178 38.505,40.178 R15.2@38.535,40.207
NetC8_1: C8.1 J1.2 R1.2 | length 5.7
  Top Layer w0.508: C8.1 R1.2 62.042,34.583 62.544,34.081 J1.2
NetC9_1: C9.1 J2.2 R2.2 | length 6
  Top Layer w0.508: C9.1@51.306,37.655 C9.1 51.621,37.34 53.531,37.34 53.594,37.277 53.53,37.213 53.53,33.863 J2.2
NetC10_1: C10.1 J3.2 R3.2 | length 6
  Top Layer w0.508: J3.2 45.339,34.752 C10.1@45.339,37.277 ; C10.1 R3.2
NetC11_1: C11.1 J4.2 R4.2 | length 9.2
  Top Layer w0.508: C11.1 57.115,60.864 57.401,60.864 58.955,62.418 R4.2 59.055,63.584 J4.2
NetC12_1: C12.1 J5.2 R5.2 | length 8.1
  Top Layer w0.508: R5.2 C12.1 ; C12.1@52.771,61.06 53.465,61.754 J5.2
NetC13_1: C13.1 J6.2 R6.2 | length 8.4
  Top Layer w0.508: J6.2 44.386,66.791 43.495,65.9 C13.1 R6.2
NetD1_1: D1.1 R16.2 | length 5.7
  Top Layer w0.508: v1(68.707,58.547) D1.1
  Bottom Layer w0.508: R16.2 v1(68.707,58.547)
NetD2_1: D2.1 R17.2 | length 5.8
  Top Layer w0.508: D2.1 66.611,62.513 66.611,58.483 v1(66.675,58.42)
  Bottom Layer w0.508: R17.2 v1(66.675,58.42)
NetD3_1: D3.1 R18.2 | length 6.2
  Top Layer w0.508: D3.1 66.609,37.687 66.609,41.721 v1(66.671,41.783)
  Bottom Layer w0.508: v1(66.671,41.783) 66.673,41.785 66.673,43.752 R18.2
NetD4_1: D4.1 R19.2 | length 6.1
  Top Layer w0.508: D4.1 v1(68.707,41.783)
  Bottom Layer w0.508: v1(68.707,41.783) R19.2
NetD5_2: D5.2 R13.1 T_PROG1.1 U4.6 | length 8.4
  Top Layer w0.2: R13.1@36.056,44.589 36.056,43.322 36.07,43.308 U4.6 ; R13.1 36.119,45.158 36.119,45.258 R13.1@36.556,45.694
  Top Layer w0.508: R13.1 36.056,44.589 38.162,42.483 38.162,42.349 38.491,42.02 D5.2@38.625,42.02 ; D5.2 38.654,41.956 39.451,41.956 T_PROG1.1@40.132,41.275
NetJ7_A5: J7.A5 R8.1 | length 3.8
  Top Layer w0.2: v1(30.114,50.847) 30.404,50.847 30.807,51.25 J7.A5
  Bottom Layer w0.508: R8.1 28.763,52.097 30.013,50.847 v1(30.114,50.847)
NetJ7_B5: J7.B5 R10.1 | length 4.7
  Top Layer w0.2: v1(30.099,49.276) 31.075,48.3 31.7,48.3 J7.B5
  Bottom Layer w0.508: R10.1 28.763,47.344 29.953,48.534 29.953,49.13 v1(30.099,49.276)
NetL1_1: L1.1 U4.2 | length 5.7
  Top Layer w0.21: 33.735,42.65 33.97,42.65 34.128,42.808 U4.2
  Top Layer w0.508: L1.1 30.164,41.41 31.404,42.65 33.735,42.65
NetR7_2: R7.2 SB3.2 U2.3 | length 18.8
  Top Layer w0.2: R7.2 30.453,66.355 31.369,65.439 31.369,64.643 32.004,64.008 37.973,64.008 38.608,63.373 39.624,63.373 39.878,63.119 39.878,61.468 40.132,61.214 40.132,59.436 40.936,58.632 U2.3 42.384,58.632 43.138,59.386 SB3.2
NetR9_1: R9.1 U1.14 U3.2 | length 9.3
  Top Layer w0.2: U1.14 32.561,56.989 32.561,57.58 32.699,57.718 35.293,57.718 ; U3.2@36.507,56.388 35.602,56.388 35.485,56.505 35.485,57.526 35.293,57.718 ; R9.1 36.896,60.225 35.293,58.622 35.293,57.718
NetR9_2: R9.2 U2.1 | length 3.9
  Top Layer w0.508: R9.2 38.796,60.225 39.142,59.879 39.142,58.775 U2.1@40.707,57.21
NetR11_1: R11.1 U1.13 U2.2 | length 21.3
  Top Layer w0.2: U1.13@31.115,56.769 31.223,56.877 31.223,57.042 31.198,57.067 31.198,57.233 31.983,58.018 34.808,58.018 34.925,58.135 34.925,58.678 35.941,59.694 35.941,63.373 36.068,63.5 37.753,63.5 38.796,62.457 R11.1 39.296,61.857 39.296,61.542 39.751,61.087 39.751,59.309 42.335,56.725 42.621,56.725 U2.2
NetR11_2: R11.2 U3.1 | length 5.5
  Top Layer w0.2: R11.2 36.896,62.257 37.846,61.307 37.846,58.039 U3.1@37.084,58.039
NetSB4_1: SB4.1 U1.3 | length 4
  Top Layer w0.2: v1(31.555,60.268) 32.385,61.098 U1.3 U1.3@32.385,62.611
  Bottom Layer w0.2: v1(31.555,60.268) 31.555,60.258 32.462,59.351 SB4.1
NetSB5_1: SB5.1 U1.2 | length 3.4
  Top Layer w0.2: v1(33.147,60.579) 33.274,60.706 33.274,61.932 U1.2
  Bottom Layer w0.2: v1(33.147,60.579) 33.147,60.289 33.476,59.96 33.476,59.376 33.426,59.376 SB5.1
ProgD_N: CR1.6 U1.6 | length 16.4
  Top Layer w0.2: U1.6 28.575,59.419 29.038,58.956 29.038,58.223 29.21,58.051 29.21,55.725 29.327,55.608 31.427,55.608 32.828,54.207 32.828,53.723 33.645,52.905 34.875,52.905 35.502,52.278 35.555,52.278 36.464,51.369 CR1.6
ProgD_P: CR1.4 U1.5 | length 18.5
  Top Layer w0.2: U1.5@29.845,62.23 29.923,62.152 v1(29.923,58.59) ; CR1.4 36.883,49.469 37.379,48.973 37.815,48.973 v1(38.02,48.768)
  Bottom Layer w0.2: v1(29.923,58.59) 30.075,58.438 30.075,57.82 38.02,49.875 v1(38.02,48.768)
PWM1: IC1.27 R1.1 | length 21.7
  Top Layer w0.2: IC1.27 48.54,42.19 v1(49.403,43.053) ; v1(63.131,42.872) 63.276,42.727 63.276,38.182 63.393,38.065 63.442,38.065 63.942,37.565 R1.1
  Bottom Layer w0.2: v1(49.403,43.053) 62.95,43.053 v1(63.131,42.872)
PWM2: IC1.28 R3.1 | length 4
  Top Layer w0.508: R3.1 49.512,39.177 49.81,39.475 IC1.28
PWM3: IC1.30 R5.1 | length 25.3
  Top Layer w0.508: v1(48.387,62.611) 48.387,62.405 48.742,62.05 48.742,61.306 R5.1 ; v1(50.116,55.104) 51.124,54.095 51.442,54.095 52.35,53.187 IC1.30
  Bottom Layer w0.508: v1(48.387,62.611) 50.292,60.706 50.292,58.096 50.116,57.92 v1(50.116,55.104)
PWM4: IC1.31 R2.1 | length 4.4
  Top Layer w0.508: IC1.31 53.607,41.237 53.607,39.037 R2.1
PWM5: IC1.33 R4.1 | length 25.7
  Top Layer w0.508: IC1.33 56.16,41.55 55.744,41.966 55.744,46.057 56.042,46.355 57.404,46.355 59.182,48.133 59.182,54.143 58.15,55.174 v1(58.15,55.371) ; R4.1 59.224,60.687 60.687,60.687 v1(60.833,60.833)
  Bottom Layer w0.508: v1(58.15,55.371) 58.224,55.371 59.361,56.508 59.841,56.508 60.833,57.499 v1(60.833,60.833)
PWM6: IC1.36 R6.1 | length 39
  Top Layer w0.508: v1(46.609,62.738) 46.609,62.532 46.959,62.182 46.959,61.306 R6.1 ; v1(49.052,56.801) 50.47,56.801 50.927,56.344 50.927,55.753 52.832,53.848 56.814,53.848 57.111,54.146 57.111,56.222 57.69,56.801 58.965,56.801 59.263,56.504 59.263,55.929 59.189,55.856 59.189,54.995 59.944,54.24 59.944,41.497 IC1.36@60.166,41.275
  Bottom Layer w0.508: v1(46.609,62.738) 49.052,60.295 v1(49.052,56.801)
STATUS_LED: IC1.37 LED1.4 | length 64.6
  Top Layer w0.508: LED1.4 32.743,66.144 35.814,69.215 64.091,69.215 64.243,69.063 64.243,68.599 v1(64.389,68.453) ; v1(60.228,55.425) 60.228,55.219 60.706,54.742 60.706,44.502 61.24,43.968 IC1.37
  Bottom Layer w0.508: v1(60.228,55.425) 60.435,55.425 61.22,56.21 61.925,56.21 64.389,58.674 v1(64.389,68.453)
USB_VBUS: CR1.5 D6.2 J7.A4_B9 J7.B4_A9 | length 19.9
  Top Layer w0.2: 30.686,47.917 30.803,47.8 31.55,47.8 J7.B4_A9 ; 30.737,52.083 30.854,52.2 31.55,52.2 J7.A4_B9
  Top Layer w0.508: 30.686,47.918 29.231,47.918 28.933,48.216 28.933,51.784 29.231,52.082 30.737,52.082 ; J7.B4_A9 31.796,47.646 32.66,47.646 33.02,48.006 33.02,48.387 33.401,48.768 34.754,48.768 35.052,49.066 35.052,49.403 36.068,50.419 CR1.5 39.533,50.419 D6.2@40.132,51.018
UsbD_N: CR1.1 J7.A7 J7.B7 | length 4.6
  Top Layer w0.2: J7.A7 31.7,49.8 31.126,49.8 30.93,49.996 30.93,50.504 31.126,50.7 31.7,50.7 31.762,50.762 32.482,50.762 33.09,51.369 CR1.1@33.733,51.369
  Top Layer w0.508: CR1.1@33.798,51.395 33.823,51.369 CR1.1@33.838,51.369
UsbD_P: CR1.3 J7.A6 J7.B6 | length 4.5
  Top Layer w0.2: J7.B6 33.514,49.25 33.733,49.469 CR1.3 ; J7.A6 32.554,50.25 33.271,49.533 CR1.3@33.626,49.533
pads on no net: IC1.4 IC1.5 IC1.10 IC1.11 IC1.12 IC1.13 IC1.14 IC1.16 IC1.17 IC1.18 IC1.19 IC1.20 IC1.21 IC1.22 IC1.23 IC1.24 IC1.26 IC1.29 IC1.32 J1. J2. J3. J4. J5. J6. J7. J7.A8 J7.B8 LED1.2 U1.7 U1.8 U1.9 U1.10 U1.11 U1.12 U1.15

## Polygon pours and split planes (outlines as drawn)
GND on Bottom Layer "GND_L02_P000" (solid, remove dead copper, pour order 0): 69.85,69.977 69.469,70.358 25.019,70.358 25.019,29.591 25.146,29.718 70.104,29.718

## Keep-outs
Keep-Out Layer:
  the board outline again, w0.254

## Other copper
Multi-Layer:
  pour cut-out: 26.416,44.196 38.354,44.196 38.354,33.02 29.845,33.02 29.464,32.639

## Silkscreen, mask and mechanical layers (free items; w line width, h text height)
Top Overlay:
  drawing of 2 lines, arcs and shapes, not listed
  text "RX" at 67.056,59.563 h1 r90
  text "TX" at 69.215,59.563 h1 r90
  text "EN" at 67.056,38.989 h1 r90
  text "0" at 69.215,38.989 h1 r90
Bottom Overlay:
  lines w0.254: 39.243,64.127 39.743,63.627 46.363,63.627 46.863,64.127 46.863,68.969 46.363,69.469 39.743,69.469 39.243,68.969 39.243,64.127 ; 39.37,30.853 39.87,30.353 46.49,30.353 46.99,30.853 46.99,35.695 46.49,36.195 39.87,36.195 39.37,35.695 39.37,30.853 ; 48.387,30.853 48.887,30.353 55.507,30.353 56.007,30.853 56.007,35.695 55.507,36.195 48.887,36.195 48.387,35.695 48.387,30.853 ; 48.387,64.127 48.887,63.627 55.507,63.627 56.007,64.127 56.007,68.969 55.507,69.469 48.887,69.469 48.387,68.969 48.387,64.127 ; 57.531,30.853 58.031,30.353 64.651,30.353 65.151,30.853 65.151,35.822 64.651,36.322 58.031,36.322 57.531,35.822 57.531,30.853 ; 57.531,64.127 58.031,63.627 64.651,63.627 65.151,64.127 65.151,69.096 64.651,69.596 58.031,69.596 57.531,69.096 57.531,64.127
  text "PWM6" at 46.355,64.156 h3
  text "PWM5" at 55.499,64.156 h3
  text "PWM4" at 64.643,64.008 h3
  text "JMW.NZ" at 51.712,53.594 h3 r270
  text "V1.0.0" at 51.71,40.007 h3 r270
  text "ESP32 GAUGE" at 53.752,40.005 h4.5 r270
  text "Designed by / Jasper M-W / 2026-08-23" at 38.354,39.878 h2
  text "PWM3" at 46.355,31.009 h3
  text "PWM2" at 55.499,30.861 h3
  text "PWM1" at 64.643,30.861 h3
Mechanical 1:
  the board outline again, w0.254

## Text inside footprints (layer, text, board x,y; h text height)
CR1: Top Overlay "*" at 33.53,52.07 h0.64; Mechanical 13 "*" at 34.495,50.597 h1.27
J7: Mechanical 13 "PCB EDGE" at 25.1,44.8 h0.61 r270
LED1: Mechanical 13 "*" at 37.424,65.229 h1.27 r180